# EAGLE board USBasp (EAGLE 4.11)
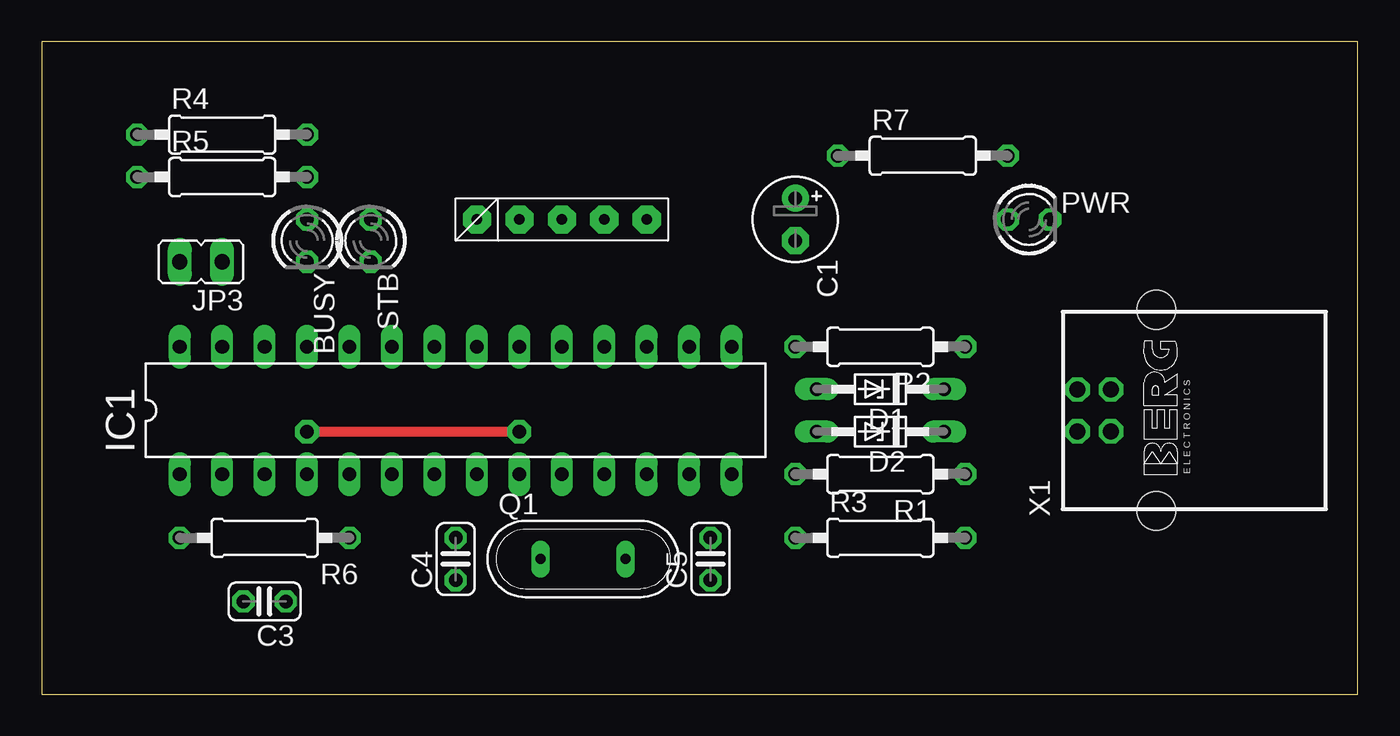
[diagram p0: board, top side]
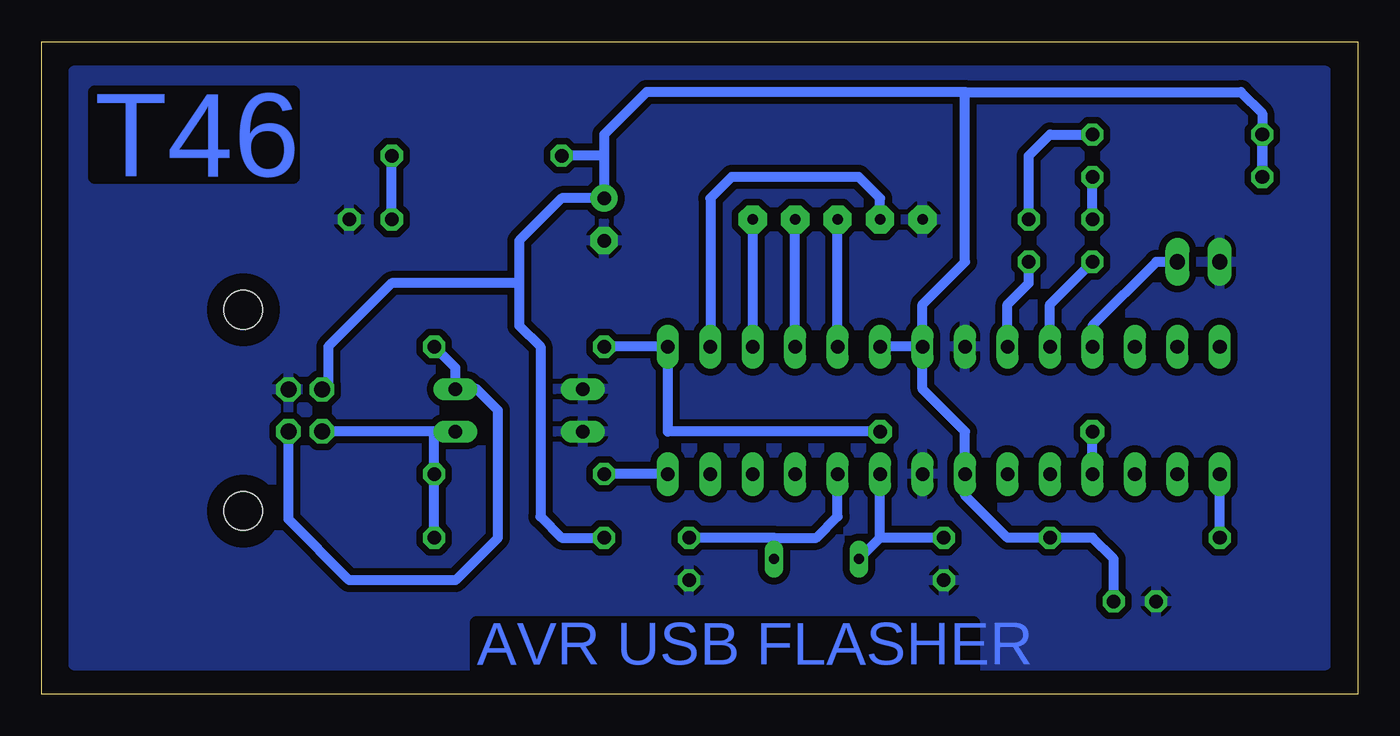
[diagram p1: board, bottom side, seen from below]

Size 78.72 x 39.04 mm. Coordinates in mm from the lower left corner, seen from the top.
Outline: 0,0 78.72,0 78.72,39.04 0,39.04 0,0
Copper layers (1*16): Top 0.035mm / dielectric 1.5mm / Bottom 0.035mm
Design rules "default": minimum track width 10mil, minimum drill 24mil, track to track 8mil, track to pad 8mil, pad to pad 8mil, via to via 8mil, smd to smd 8mil, copper to edge 40mil, drill to drill 8mil, minimum pad ring 10mil, minimum via ring 8mil, stop-mask expansion 4mil, vias tented up to drill 0mil, thermal gap 10mil

## Footprints (pad centres in the part's own frame; a part is rotated, then mirrored left to right if it is on the bottom)
LED3MM = drill 0.813 octagon: A -1.27,0; K 1.27,0
E2,5-5 = drill 0.813 pad 1.6 round: + -1.27,0 | drill 0.813 pad 1.6 octagon: - 1.27,0
C025-024X044 = drill 0.813 octagon: 1 -1.27,0; 2 1.27,0
DO34Z7 = drill 0.813 long: A 3.81,0; C -3.81,0
DIL28-3 = drill 0.813 long: 1 -16.51,-3.81; 2 -13.97,-3.81; 3 -11.43,-3.81; 4 -8.89,-3.81; 5 -6.35,-3.81; 6 -3.81,-3.81; 7 -1.27,-3.81; 8 1.27,-3.81; 9 3.81,-3.81; 10 6.35,-3.81; 11 8.89,-3.81; 12 11.43,-3.81; 13 13.97,-3.81; 14 16.51,-3.81; 15 16.51,3.81; 16 13.97,3.81; 17 11.43,3.81; 18 8.89,3.81; 19 6.35,3.81; 20 3.81,3.81; 21 1.27,3.81; 22 -1.27,3.81; 23 -3.81,3.81; 24 -6.35,3.81; 25 -8.89,3.81; 26 -11.43,3.81; 27 -13.97,3.81; 28 -16.51,3.81
JP1 = drill 0.914 long: 1 0,-1.27; 2 0,1.27
QS = drill 0.61 long: 1 -2.54,0; 2 2.54,0
0207/10 = drill 0.813 octagon: 1 -5.08,0; 2 5.08,0
P1X5 = drill 0.61 pad 1.676 octagon: 1 0,0; 2 2.54,0; 3 5.08,0; 4 7.62,0; 5 10.16,0
PN61729 = drill 0.95 octagon: 1 1.25,4.71; 2 -1.25,4.71; 3 -1.25,2.71; 4 1.25,2.71 | hole 2.3: -6.02,0; 6.02,0

## Placement (x,y rotation side)
BUSY  [LED3MM]  15.87,27.14 270 top
C1  4u7  [E2,5-5]  45.08,28.41 270 top
C3  100n  [C025-024X044]  13.33,5.55 180 top
C4  22p  [C025-024X044]  24.76,8.09 90 top
C5  22p  [C025-024X044]  40,8.09 90 top
D1  3V6  [DO34Z7]  50.16,18.25 180 top
D2  3V6  [DO34Z7]  50.16,15.71 180 top
IC1  ATMega48*  [DIL28-3]  24.76,16.98 0 top
JP3  Slow SCK  [JP1]  9.52,25.87 90 top
PWR  [LED3MM]  59.05,28.41 0 top
Q1  [QS]  32.38,8.09 0 top
R1  68  [0207/10]  50.16,13.17 180 top
R2  68  [0207/10]  50.16,20.79 180 top
R3  2k2  [0207/10]  50.16,9.36 0 top
R4  1k  [0207/10]  10.79,33.49 0 top
R5  1k  [0207/10]  10.79,30.95 0 top
R6  10k  [0207/10]  13.33,9.36 180 top
R7  1k  [0207/10]  52.7,32.22 0 top
STB  [LED3MM]  19.68,27.14 270 top
U$1  ISP  [P1X5]  36.19,28.41 180 top
X1  [PN61729]  66.67,16.98 90 top

## Library data of the parts
BUSY PWR STB = led
C1 C3-C5 R1-R7 = rcl
D1 D2 = diode
IC1 = atmel
JP3 = jumper
Q1 = special
U$1 = WAM
X1 = con-berg

## Nets
+5V: C1.+ C3.1 IC1.7 IC1.20 IC1.21 R3.1 R4.1 R5.1 R6.1 R7.1 X1.1
GND: C1.- C3.2 C4.1 C5.1 D1.A D2.A IC1.8 IC1.22 JP3.2 PWR.K U$1.5 X1.4
N$1: C5.2 IC1.10 Q1.2
N$2: IC1.16 U$1.4
N$3: IC1.17 U$1.1
N$4: IC1.18 U$1.2
N$5: D2.C R1.1 R3.2 X1.2
N$6: IC1.19 U$1.3
N$7: IC1.4 IC1.15 R2.2
N$8: D1.C R2.1 X1.3
N$9: IC1.1 R6.2
N$10: C4.2 IC1.9 Q1.1
N$11: PWR.A R7.2
N$12: IC1.25 JP3.1
N$13: R4.2 STB.A
N$14: IC1.23 STB.K
N$15: BUSY.K IC1.24
N$16: IC1.14 R1.2
N$25: BUSY.A R5.2

## Tracks (layer width: path | path; a pad name or v marks a point on that pad's centre or on a via)
+5V
  Bottom 0.61: 15.87,9.36 R6.1 | C3.1 14.6,8.09 15.87,9.36 | 15.87,9.36 20.95,9.36 23.49,11.9 IC1.7 23.49,15.71 26.03,18.25 IC1.21 | IC1.21 IC1.20 IC1.21 | 50.16,24.6 50.16,27.14 47.62,29.68 C1.+ 45.08,32.22 | 50.16,24.6 57.78,24.6 61.59,20.79 61.59,18.25 61.61,18.23 X1.1 | R3.1 47.62,9.36 48.89,10.63 48.89,20.79 50.16,22.06 50.16,24.6 | R4.1 R5.1 5.71,34.76 6.98,36.03 23.49,36.03 | 23.49,36.03 23.49,25.87 26.03,23.33 IC1.21 | 45.08,32.22 45.08,33.49 42.54,36.03 23.49,36.03 | 45.08,32.22 R7.1
GND
  pour Bottom (isolate 0.406): 1.9,37.3 76.83,37.3 76.83,1.74 1.9,1.74
N$1
  Bottom 0.61: 34.92,9.36 C5.2 | Q1.2 34.92,9.36 | 34.92,9.36 32.38,9.36 31.11,10.63 IC1.10
N$2
  Bottom 0.61: U$1.4 28.57,29.68 29.84,30.95 37.46,30.95 38.73,29.68 IC1.16
N$3
  Bottom 0.61: IC1.17 U$1.1
N$4
  Bottom 0.61: IC1.18 U$1.2
N$5
  Bottom 0.61: 55.24,15.71 R1.1 R3.2 | 55.24,15.71 D2.C | X1.2 55.26,15.73 55.24,15.71
N$6
  Bottom 0.61: IC1.19 U$1.3
N$7  (via drill 0.81 pad 1.42)
  Top 0.61: v15.87,15.71 v28.57,15.71
  Bottom 0.61: R2.2 IC1.15 41.27,15.71 v28.57,15.71 | IC1.4 v15.87,15.71
N$8
  Bottom 0.61: X1.3 63.96,10.46 60.32,6.82 53.97,6.82 51.43,9.36 51.43,16.98 52.7,18.25 D1.C 53.97,19.52 R2.1
N$9
  Bottom 0.61: R6.2 IC1.1
N$10
  Bottom 0.61: 28.57,9.36 Q1.1 | 28.57,9.36 IC1.9 | C4.2 28.57,9.36
N$11
  Bottom 0.61: PWR.A R7.2
N$12
  Bottom 0.61: IC1.25 15.87,22.06 12.06,25.87 JP3.1
N$13
  Bottom 0.61: R4.2 18.41,33.49 19.68,32.22 STB.A
N$14
  Bottom 0.61: IC1.23 20.95,23.33 19.68,24.6 STB.K
N$15
  Bottom 0.61: IC1.24 18.41,23.33 BUSY.K
N$16
  Bottom 0.61: IC1.14 R1.2
N$25
  Bottom 0.61: BUSY.A R5.2

## Text on the board
Bottom: T46 | AVR USB FLASHER